# Altium PCB PCB1_1.pcbdoc
Units mil, origin at the board's own origin, x right, y up, seen from the top; angles counter-clockwise.
Board outline 1764.32 x 1571.64 mil, 2 copper layers (Top Layer, Bottom Layer); 44 components, 41 nets, 156 pads, 77 vias.
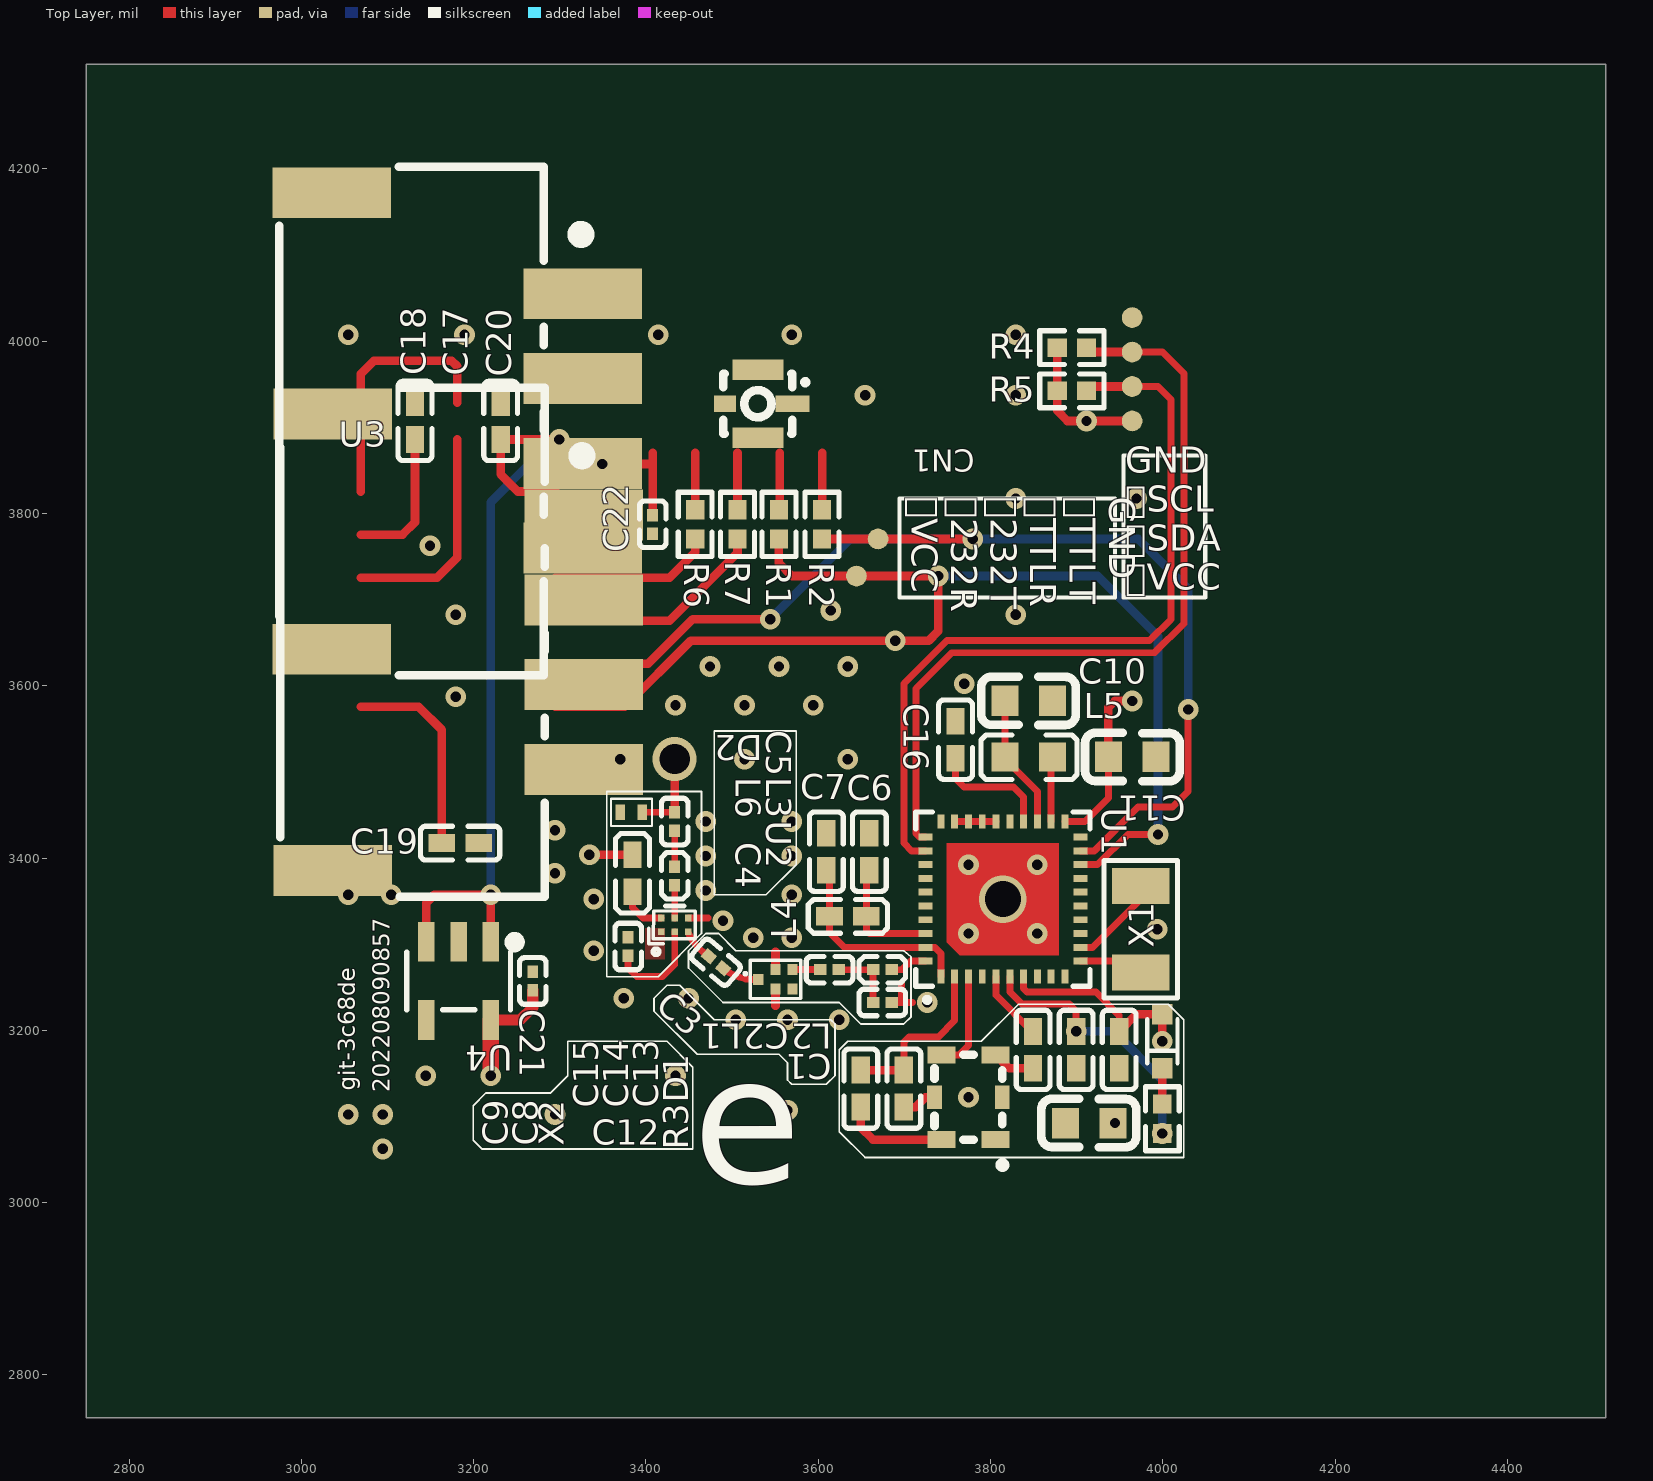
[diagram p0: Top Layer view]
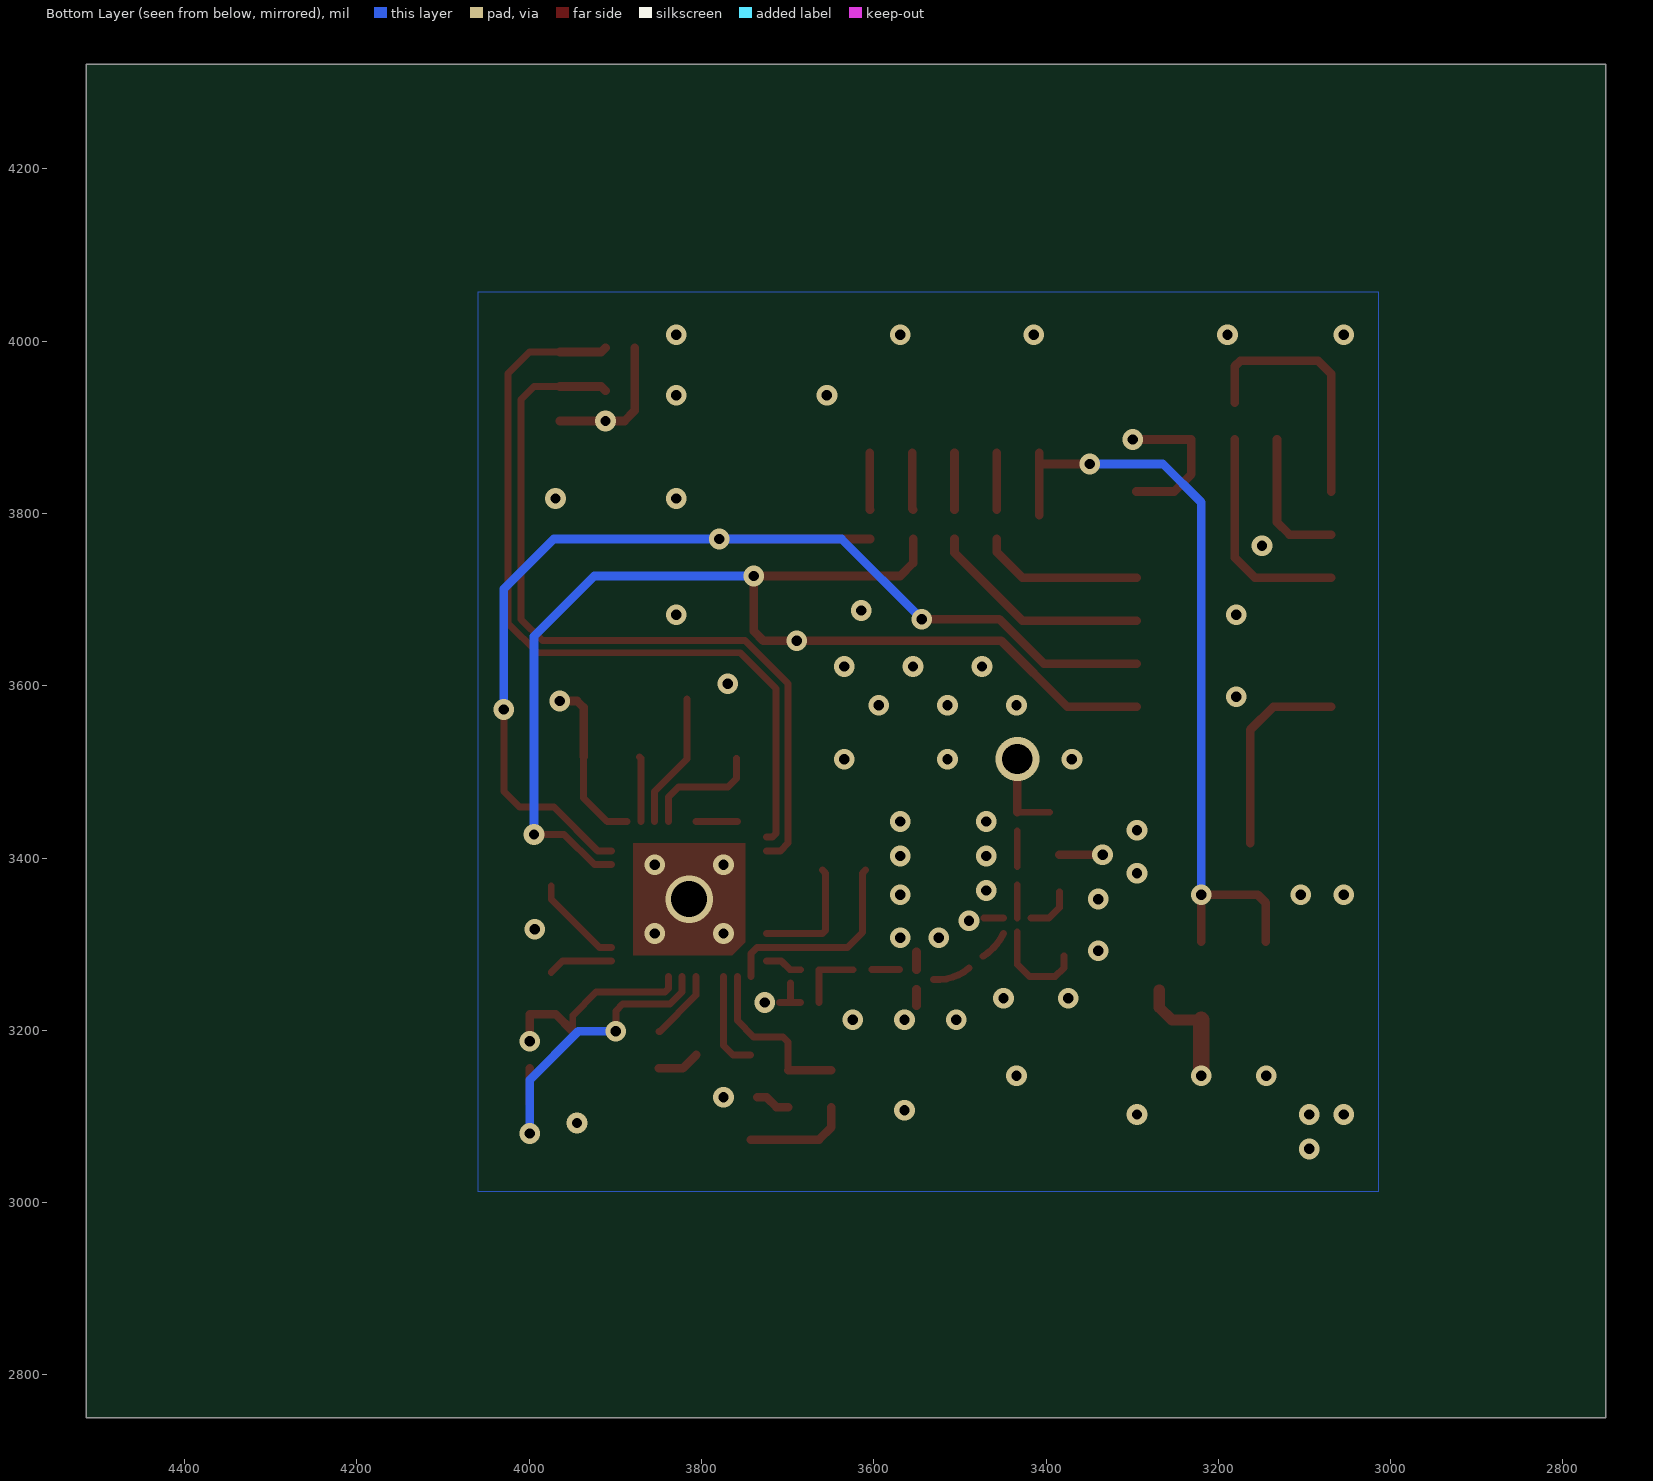
[diagram p1: Bottom Layer view, seen from below]

## Layer stack, top to bottom
Top Solder: solder mask 0.4, Solder Resist, Dk 3.5
Top Layer: signal copper 1.4
Dielectric 1: dielectric 12.6, FR-4, Dk 4.8
Bottom Layer: signal copper 1.4
Bottom Solder: solder mask 0.4, Solder Resist, Dk 3.5

## Board outline
4514.32,2750 2750,2750 2750,4321.64 4514.32,4321.64

## Components (designator, comment, footprint, x,y, rotation, side; value= is the part's Value field where it differs from the comment)
C1 "GRM0335C1H2R2CA01D" C0201 3674.32,3232.32 r180 top
C2 "GRM0335C1H470JA01D" C0201 3613.08,3270.32 r0 top
C3 "GRM0335C1H470JA01D" C0201 3481.23,3279.02 r140 top
C4 "CL03A104KQ3NNNC" C0201 3379.32,3297.32 r270 top
C5 "GRM0335C1H470JA01D" C0201 3433.32,3442.32 r270 top
C6 "CL05A225MQ5NNNC" C0402 3659.32,3407.32 r270 top
C7 "CL05A225MQ5NNNC" C0402 3609.32,3407.32 r270 top
C8 "CL05A225MQ5NNNC" C0402 3699.32,3132.32 r90 top
C9 "CL05B102KB5NNNC" C0402 3649.32,3132.32 r90 top
C10 "CL10A475KQ8NNNC" C0603 3844.32,3582.32 r0 top
C11 "CL10A475KQ8NNNC" C0603 3964.32,3517.32 r180 top
C12 "CL10A475KQ8NNNC" C0603 3914.32,3092.32 r0 top
C13 "CL05A225MQ5NNNC" C0402 3949.32,3177.32 r90 top
C14 "CL05A225MQ5NNNC" C0402 3899.32,3177.32 r90 top
C15 "CL05A225MQ5NNNC" C0402 3849.32,3177.32 r90 top
C16 "CL05A225MQ5NNNC" C0402 3759.32,3537.32 r270 top
C17 "CL05A225MQ5NNNC" CONN-TH_4P-P0.20_XUNPU_WAFER-XH2.54-4PWB 3180.86,3907.32 r270 top
C18 "CL05A225MQ5NNNC" C0402 3131.86,3907.32 r90 top
C19 "CL05A225MQ5NNNC" C0402 3184.32,3417.32 r180 top
C20 "CL05A225MQ5NNNC" C0402 3231.36,3907.32 r90 top
C21 "GRM0335C1H470JA01D" C0201 3268.55,3257.32 r270 top
C22 "GRM0335C1H470JA01D" C0201 3407.8,3787.32 r90 top
CN1 "CONN-SMD_6P-P1.25_L4.4-W12.4" IPEX-SMD_4P-L1.7-W1.7-LS2.0-L 3530.82,3927.32 r180 top
D1 "RB751S-40" SOD-523_L1.2-W0.8-LS1.6-FD 3999.32,3187.32 r270 top
D2 "ESD105-B1-02EL E6327" TSLP-2-20_L1.0-W0.6-P0.65-BI 3382.92,3453.12 r180 top
L1 "SAFEB1G57KE0F00R15" FILTER-SMD_5P-L1.4-W1.1-L_HDF1588E-B2 3550.32,3259.02 r0 top
L2 "LQP03TG10NH02D" L0201 3674.32,3270.32 r0 top
L3 "LQP03TN6N8H02D" L0201-RD 3433.32,3379.32 r90 top
L4 "BLM15AG601SN1D" L0402 3634.32,3332.32 r180 top
L5 "LQM18PN2R2NC0L" L0603 3844.32,3517.32 r180 top
L6 "BLM15AG601SN1D" L0402 3384.32,3382.32 r270 top
R1 "CR0402J1K00Q10Z" R0402 3554.32,3787.32 r90 top
R2 "CR0402J1K00Q10Z" R0402 3604.32,3787.32 r90 top
R3 "0402WGJ0561TCE" R0402 3999.32,3097.32 r270 top
R4 "CRCW04024K70JNED" R0402 3894.32,3992.32 r0 top
R5 "CRCW04024K70JNED" R0402 3894.32,3942.32 r0 top
R6 "CR0402J1K00Q10Z" R0402 3457.02,3787.32 r90 top
R7 "CR0402J1K00Q10Z" R0402 3506.22,3787.32 r90 top
U1 "TD1030QFN" TD1030QFN40 3814.32,3352.32 r0 top
U2 "BGA 824N6 E6327" TSNP-6_L1.1-W0.7-P0.40-BL 3433.32,3322.32 r0 top
U3 "CBM3232AS16" CONN-TH_4P-P0.20_XUNPU_WAFER-XH2.54-4PWB 3181.93,3650.43 r270 top
U4 "MIC5203-3.3YM5-TR" SOT-23-5_L3.0-W1.7-P0.95-LS2.8-BL 3182.46,3257.32 r180 top
X1 "NX3215SA-32.768K-STD-MUA-9" OSC-SMD_L3.2-W1.5 3974.32,3317.32 r90 top
X2 "TCO22260002805" SMD-2520_6P-L2.5-W2.0 3774.32,3122.32 r90 top

## Footprints (in the part's own frame and the unit in brackets; to place one, negate y for a bottom-side part, rotate by r counter-clockwise, add the part's x,y. Pads: shape width x height; smd on the part's side, far side on the other; paste and mask are expansions set on the pad)
C0201 [mil]
  rect 14.51x12.76 smd: 1(-10.8,0) 2(10.8,0)
  silkscreen extent -27,-15 27,15
C0402 [mm]
  rect 0.79x0.54 smd: 1(-0.545,0) 2(0.545,0)
  silkscreen extent -1.17,-0.5 1.17,0.5
C0603 [mm]
  rect 0.8x0.9 smd: 1(-0.7,0) 2(0.7,0)
  silkscreen extent -1.41,-0.71 1.39,0.72
CONN-TH_4P-P0.20_XUNPU_WAFER-XH2.54-4PWB [mm]
  rect 1.5x3.5 smd: 1(-3.75,3.7) 2(-1.25,3.7) 3(1.25,3.7) 4(3.75,3.7) 5(-6.73,-3.7) 6(6.73,-3.7)
  silkscreen extent -7.5,-5.25 7.5,3.85
FILTER-SMD_5P-L1.4-W1.1-L_HDF1588E-B2 [mm]
  rect 0.3x0.325 smd: 1(-0.506,0) 2(0.001,-0.288) 3(0.506,-0.288) 4(0.506,0.288) 5(0.001,0.288)
  silkscreen extent -0.93,-0.56 0.75,0.57
IPEX-SMD_4P-L1.7-W1.7-LS2.0-L [mm]
  rect 1x0.5 smd: 1(-1,0)
  rect 1.5x0.6 smd: 2(0.025,-1) 4(0.025,1)
  rect 0.65x0.5 smd: 3(1,0)
  silkscreen extent -1.45,-0.89 1.04,0.89
L0201 [mil]
  rect 14.51x12.76 smd: 1(-10.8,0) 2(10.8,0)
  silkscreen extent -27,-15 27,15
L0201-RD [mil]
  rect 14.51x12.76 smd: 1(-10.8,0) 2(10.8,0)
  silkscreen extent -35,-15 27,15
L0402 [mm]
  rect 0.79x0.54 smd: 1(-0.545,0) 2(0.545,0)
  silkscreen extent -1.17,-0.5 1.17,0.5
L0603 [mm]
  rect 0.8x0.864 smd: 1(-0.7,0) 2(0.7,0)
  silkscreen extent -1.42,-0.65 1.41,0.67
OSC-SMD_L3.2-W1.5 [mil]
  rect 41.3x66.9 smd: 1(-50.2,0) 2(50.2,0)
  silkscreen extent -80,-43 80,43
R0402 [mm]
  rect 0.566x0.54 smd: 1(-0.433,0) 2(0.433,0)
  silkscreen extent -0.94,-0.5 0.94,0.5
SMD-2520_6P-L2.5-W2.0 [mil]
  rect 19.7x32.5 smd: 1(-49.2,-31.5) 3(49.2,-31.5) 4(49.2,31.5) 6(-49.2,31.5)
  rect 27.6x16.9 smd: 2(0,-39.4) 5(0,39.4)
  silkscreen extent -82,-42 49,39
SOD-523_L1.2-W0.8-LS1.6-FD [mil]
  rect 23.6x23.6 smd: 1(-31.5,0) 2(31.5,0)
  silkscreen extent -26,-18 26,18
SOT-23-5_L3.0-W1.7-P0.95-LS2.8-BL [mm]
  rect 0.49x1.157 smd: 1(-0.95,-1.154) 2(0,-1.154) 3(0.95,-1.154)
  rect 0.49x1.175 smd: 4(0.95,1.154) 5(-0.95,1.154)
  silkscreen extent -1.8,-1.29 1.53,0.85
TD1030QFN40 [mil]
  rect 8x16 smd: 1(-72,-90) 2(-56,-90) 3(-40,-90) 4(-24,-90) 5(-8,-90) 6(8,-90) 7(24,-90) 8(40,-90) 9(56,-90) 10(72,-90) 21(72,90) 22(56,90) 23(40,90) 24(24,90) 25(8,90) 26(-8,90) 27(-24,90) 28(-40,90) 29(-56,90) 30(-72,90)
  rect 16x8 smd: 11(90,-72) 12(90,-56) 13(90,-40) 14(90,-24) 15(90,-8) 16(90,8) 17(90,24) 18(90,40) 19(90,56) 20(90,72) 31(-90,72) 32(-90,56) 33(-90,40) 34(-90,24) 35(-90,8) 36(-90,-8) 37(-90,-24) 38(-90,-40) 39(-90,-56) 40(-90,-72)
  Top Layer region: -65,65 65,65 65,-65 -50,-65 -65,-50
  silkscreen extent -101,-120 101,101
TSLP-2-20_L1.0-W0.6-P0.65-BI [mil]
  rect 11x17.7 smd: 1(-13,0) 2(13,0)
  silkscreen extent -24,-16 23,16
TSNP-6_L1.1-W0.7-P0.40-BL [mil]
  rect 7.9x7.9 smd: 1(-15.7,-7.9) 2(0,-7.9) 3(15.8,-7.9) 4(15.8,7.9) 5(0,7.9) 6(-15.7,7.9)
  silkscreen extent -30,-34 24,16

## Free pads (board coordinates)
  round 24 smd: TP1(3644.32,3727.32) TP2(3669.32,3770.32) TP4(3964.32,4027.32) TP5(3964.32,3947.32) TP6(3964.32,3987.32) TP7(3964.32,3907.32)

## Via types
v1: diameter 24.02, hole 12.01, Top Layer to Bottom Layer, 71 vias
v2: diameter 24, hole 12, Top Layer to Bottom Layer, 4 vias
v3: diameter 51, hole 35, Top Layer to Bottom Layer, 1 vias
v4: diameter 55, hole 42, Top Layer to Bottom Layer, 1 vias

## Nets (pads, with @x,y where several pads share a name; then routed paths per layer and width w, separated by ;. In a path a pad name is that pad's centre, name@x,y a point inside that pad or via, vN(x,y) a via of type N, cw(c..) or ccw(c..) an arc to the next point about the centre after c; other vN are vias at no path point)
232_RX0: CN1.4 | length 65.9
  Top Layer w10: 3506.22,3804.36 3506.22,3870.23
232_TX0:  | length 65.9
  Top Layer w10: 3457.01,3804.37 3457.01,3870.23
$1N3753: L2.1 | length 77.6
  Top Layer w8: 3623.88,3270.32 L2.1 3663.52,3232.32
$1N3829: C2.1 L1.4 | length 32
  Top Layer w8: L1.4 C2.1@3602.24,3270.36
$1N4304: U2.2 | length 116.2
  Top Layer w8: 3379.32,3286.52 3379.32,3272.32 3389.32,3262.32 3419.32,3262.32 3433.32,3276.32 U2.2
$1N5920: U2.5 | length 38.3
  Top Layer w8: U2.5 3433.32,3368.52
$1N6055: L3.2 | length 41.4
  Top Layer w8: L3.2 3433.32,3431.52
$1N6532: U2.3 | length 35.8
  Top Layer w8: U2.3@3449.32,3312.32 ccw(c3507.96,3341.13) 3472.95,3285.96
$1N6544: C3.1 | length 44.3
  Top Layer w8: C3.1@3489.32,3272.32 ccw(c3525.79,3314.87) 3530.4,3259.02
$1N6600: C5.1 D2.1 | length 99.1
  Top Layer w8: D2.1 C5.1
  Top Layer w10: C5.1 v3(3433.32,3514.82)
$1N9128: C9.1 X2.6 | length 122.9
  Top Layer w10: C9.1 3649.32,3087.32 3663.52,3073.12 X2.6
$1N17423: R3.1 | length 41.5
  Top Layer w10: R3.1 3999.32,3155.82
$2N670: C18.1 U3.2 | length 165
  Top Layer w10: 3068.84,3775.43 3117.43,3775.43 3131.86,3789.86 C18.1
$2N675: U3.6 | length 236.5
  Top Layer w10: 3068.84,3575.43 3136.21,3575.43 3162.86,3548.78 3162.86,3417.32
$2N680: C17.1 | length 299.6
  Top Layer w10: 3068.84,3825.43 3068.84,3961.84 3084.32,3977.32 3174.32,3977.32 3180.86,3970.78 3180.86,3928.78
$2N685: U3.3 | length 258.7
  Top Layer w10: 3068.84,3725.43 3157.43,3725.43 3180.86,3748.86 3180.86,3885.86
$2N845: R6.1 | length 189.5
  Top Layer w10: 3295.02,3725.43 3427.43,3725.43 3457.02,3755.02 R6.1
$2N849: R7.1 | length 259.9
  Top Layer w10: 3295.02,3675.43 3427.43,3675.43 3506.22,3754.22 R7.1
GND: C1.1 C4.1 C6.1 C7.1 C8.1 C11.1 C12.1 C13.1 C14.1 C15.1 C16.1 C19.1 C21.1 C22.1 CN1.1 L1.2 L1.3 L1.5 pad.TP4 U1.26 U1.27 U1.28 U1.29 U2.1 U2.4 U4.2 X2.2 X2.3 X2.5 | length 248.4
  Top Layer w8: U2.4 3472.22,3330.22 ; C1.1 3696.51,3232.32 ; 3696.51,3254.84 3696.51,3232.32 ; 3709.32,3232.32 3696.51,3232.32 ; U1.29 U1.28 U1.27 U1.26
  Top Layer w10: 3550.34,3228.34 L1.2 ; L1.5 3550.34,3291.3 ; C8.1 3712.86,3110.86 3724.32,3122.32 X2.5 ; X2.3 3821.48,3155.86 C15.1
  other v1: 3094.32,3062.32 3054.32,3102.32 3094.32,3102.32 3294.32,3102.32 3564.32,3107.32 3774.32,3122.32 3144.32,3147.32 3434.32,3147.32 3504.32,3212.32 3564.32,3212.32 3624.32,3212.32 3726.32,3232.32 3374.32,3237.32 3449.32,3237.32 3339.32,3292.32 3524.32,3307.32 3569.32,3307.32 3993.4,3317.32 3489.32,3327.32 3339.32,3352.32 3054.32,3357.32 3104.32,3357.32 3569.32,3357.32 3469.32,3362.32 3294.32,3382.32 3469.32,3402.32 3569.32,3402.32 3294.32,3432.32 3469.32,3442.32 3569.32,3442.32 3369.93,3514.82 3514.32,3514.82 3434.32,3577.32 3514.32,3577.32 3594.32,3577.32 3179.32,3587.32 3769.32,3602.32 3474.32,3622.32 3554.32,3622.32 3634.32,3622.32 3179.32,3682.32 3829.32,3682.32 3614.32,3687.32 3149.32,3762.32 3829.32,3817.32 3969.32,3817.32 3654.32,3937.32 3829.32,3937.32 3054.32,4007.32 3189.32,4007.32 3414.32,4007.32 3569.32,4007.32 3829.32,4007.32
GPIO_RX0: pad.TP2 R2.1 U1.19 | length 1381.4
  Top Layer w8: U1.19 3920.32,3408.32 3971.33,3459.33 4011.33,3459.33 4029.32,3477.32 v1(4029.32,3572.32)
  Top Layer w10: 3295.02,3625.43 3402.43,3625.43 3454.32,3677.32 v1(3544.32,3677.32) ; R2.1@3604.36,3770.32 pad.TP2 v1@3778.82,3770.32
  Bottom Layer w10: v1(3544.32,3677.32) 3637.32,3770.32 v1(3779.32,3770.32) 3971.32,3770.32 4029.32,3712.32 v1(4029.32,3572.32)
GPIO_TX0: pad.TP1 R1.1 U1.18 | length 1382.2
  Top Layer w8: U1.18 3924.32,3392.32 3959.32,3427.32 v1(3994.32,3427.32)
  Top Layer w10: 3295.02,3575.43 3375.06,3575.43 3451.95,3652.32 v1(3689.32,3652.32) 3728.11,3652.32 3739.32,3663.53 v1(3739.32,3727.32) pad.TP1 3569.32,3727.32 3554.32,3742.32 R1.1
  Bottom Layer w10: v1(3739.32,3727.32) 3924.32,3727.32 3994.32,3657.32 v1(3994.32,3427.32)
LDO_B_O: U1.5 | length 82
  Top Layer w8: U1.5 3806.32,3240.72 3848.26,3198.78 3849.32,3198.78
LDO_C_O: U1.24 | length 139.9
  Top Layer w8: 3759.32,3515.86 3759.32,3492.32 3769.32,3482.32 3826.69,3482.32 3838.32,3470.69 U1.24
LNA_I: U1.40 | length 43.3
  Top Layer w8: 3685.12,3270.32 3697.32,3270.32 3707.32,3280.32 U1.40
P_1_39: U1.39 | length 240.1
  Top Layer w8: 3609.32,3385.86 3612.86,3382.32 3612.86,3332.32 3612.86,3313.78 3630.32,3296.32 U1.39 3735.32,3296.32 3742.32,3289.32 3742.32,3262.32
P_2&LDO_X_OUT: U1.2 | length 202.9
  Top Layer w8: 3699.32,3153.78 3699.32,3186.33 3705.31,3192.32 3739.32,3192.32 3758.32,3211.32 U1.2
  Top Layer w10: 3649.32,3153.78 3699.32,3153.78
P_22: U1.22 | length 75.6
  Top Layer w8: U1.22 3870.32,3515.76 3871.87,3517.32
P_23: C10.1 L5.2 U1.23 | length 155.6
  Top Layer w8: L5.2@3816.76,3514.87 3854.32,3477.32 U1.23 ; L5.2 C10.1@3816.76,3584.76
P_38: L4.1 U1.38 | length 141.5
  Top Layer w8: 3659.32,3385.86 3655.78,3382.32 L4.1 3655.78,3315.86 3659.32,3312.32 U1.38
RTC_I: U1.12 X1.2 | length 108.4
  Top Layer w8: U1.12 3918.32,3296.32 3974.32,3352.32 X1.2
RTC_O: U1.11 | length 75.5
  Top Layer w8: U1.11 3961.12,3280.32 3974.32,3267.12
S_RX0: CN1.2 | length 66
  Top Layer w10: 3604.32,3804.36 3604.65,3804.69 3604.65,3870.23
S_TX0: CN1.3 | length 66.3
  Top Layer w10: 3554.32,3804.36 3555.43,3805.47 3555.43,3870.23
SCL: pad.TP6 U1.31 | length 938.6
  Top Layer w8: U1.31 3717.32,3424.32 3713.32,3428.32 3713.32,3596.52 3755.12,3638.32 3990.32,3638.32 4024.32,3672.32 4024.32,3962.32 3999.32,3987.32 pad.TP6
  Top Layer w10: 3911.36,3992.32 3916.36,3987.32 pad.TP6
SDA: pad.TP5 U1.32 | length 916.2
  Top Layer w8: U1.32 3708.32,3408.32 3699.32,3417.32 3699.32,3602.32 3749.32,3652.32 3984.52,3652.32 4009.32,3677.12 4009.32,3932.32 3994.32,3947.32 pad.TP5
  Top Layer w10: 3911.36,3942.32 3916.36,3947.32 pad.TP5
V_BCKP: U1.6 | length 313
  Top Layer w8: U1.6 3822.32,3244.52 3836.52,3230.32 3891.32,3230.32 3899.32,3222.32 v1(3899.32,3198.78)
  Bottom Layer w10: v1(3899.32,3198.78) 3942.86,3198.78 3999.32,3142.32 v1(3999.32,3080.28)
VCC: C20.1 D1.1 L6.1 pad.TP7 R4.1 R5.1 U1.7 U1.21 U4.5 | length 978.3
  Top Layer w8: U1.7 3838.32,3248.32 3842.32,3244.32 3922.32,3244.32 3949.32,3217.32 3949.32,3198.78 ; U1.21 3909.32,3442.32 3936.76,3469.76 3936.76,3517.32
  Top Layer w10: 3295.02,3825.43 3251.21,3825.43 3231.36,3845.28 C20.1 v1@3299.28,3885.86 ; v1(3334.32,3403.78) L6.1 ; R4.1 R5.1 3877.28,3919.36 3889.32,3907.32 v1(3911.32,3907.32) pad.TP7 ; 3936.76,3517.32 3936.76,3574.76 3944.32,3582.32 v1(3964.32,3582.32) ; 3949.32,3198.78 3969.36,3218.82 D1.1 v1(3999.32,3187.32)
  Top Layer w12.8: U4.5 3253.9,3211.9 3268.55,3226.55 3268.55,3246.52
  Top Layer w19.3: v1@3219.86,3147.36 U4.5
  other v1: 3944.32,3092.32 3219.82,3147.32 3634.32,3514.82 3299.32,3885.82
VCC_RF_3V3:  | length 56.9
  Top Layer w8: 3384.32,3360.86 3384.32,3342.32 3396.42,3330.22 3417.62,3330.22
VCC_SOURCE: U4.3 | length 912.5
  Top Layer w10: U4.3 3145.06,3348.06 3154.32,3357.32 v1(3219.86,3357.32) 3219.86,3302.74 ; v1(3349.32,3857.32) 3407.8,3857.32 ; 3407.8,3798.12 3407.8,3857.32 ; 3407.8,3870.23 3407.8,3857.32
  Bottom Layer w10: v1(3219.86,3357.32) 3219.86,3812.86 3264.32,3857.32 v1(3349.32,3857.32)
XTAL_I: U1.3 X2.4 | length 116
  Top Layer w8: X2.4 3763.52,3171.52 3774.32,3182.32 U1.3
"": 
pads on no net: C1.2 C2.2 C3.2 C4.2 C5.2 C6.2 C7.2 C8.2 C9.2 C10.2 C11.2 C12.2 C13.2 C14.2 C15.2 C16.2 C17.2 C17.3 C17.4 C17.5 C17.6 C18.2 C19.2 C20.2 C21.2 C22.2 D1.2 D2.2 L1.1 L2.2 L3.1 L4.2 L5.1 L6.2 R1.2 R2.2 R3.2 R4.2 R5.2 R6.2 R7.2 U1.1 U1.4 U1.8 U1.9 U1.10 U1.13 U1.14 U1.15 U1.16 U1.17 U1.20 U1.25 U1.30 U1.33 U1.34 U1.35 U1.36 U1.37 U2.6 U3.1 U3.4 U3.5 U4.1 U4.4 X1.1 X2.1
copper on no net:
  other v2: 3774.32,3312.32 3854.32,3312.32 3774.32,3392.32 3854.32,3392.32
  other v4: 3814.32,3352.32

## Polygon pours and split planes (outlines as drawn)
GND on Top Layer (solid, remove dead copper): 3014.32,3012.32 4059.32,3012.32 4059.32,4057.32 3014.32,4057.32
GND on Bottom Layer (solid, remove dead copper, pour order 1): 3014.32,3012.32 4059.32,3012.32 4059.32,4057.32 3014.32,4057.32
GND on Internal Plane 1 (split plane): 4057.22,3084.04 cw(c4022.41,3049.23) 3987.59,3014.42 3084.04,3014.42 cw(c3049.23,3049.23) 3014.42,3084.04 3014.42,3987.59 cw(c3049.23,4022.41) 3084.04,4057.22 3987.59,4057.22 cw(c4022.41,4022.41) 4057.22,3987.59 4057.22,3084.04
VCC on Internal Plane 2 (split plane): 4057.22,3084.04 cw(c4022.41,3049.23) 3987.59,3014.42 3084.04,3014.42 cw(c3049.23,3049.23) 3014.42,3084.04 3014.42,3987.59 cw(c3049.23,4022.41) 3084.04,4057.22 3987.59,4057.22 cw(c4022.41,4022.41) 4057.22,3987.59 4057.22,3084.04

## Silkscreen, mask and mechanical layers (free items; w line width, h text height)
Top Overlay:
  lines w2: 3309.32,3147.32 3289.32,3127.32 3214.32,3127.32 3199.32,3112.32 3199.32,3072.32 3209.32,3062.32 3454.32,3062.32 3454.32,3157.32 3424.32,3187.32 3309.32,3187.32 3309.32,3147.33 ; 3479.32,3547.32 3574.32,3547.32 3574.32,3392.32 3539.32,3357.32 3479.32,3357.32 3479.32,3547.36 ; 3354.32,3262.32 3414.32,3262.32 3464.32,3312.32 3464.32,3477.32 3354.32,3477.32 3354.32,3262.32 ; 3409.32,3222.32 3459.32,3172.32 3554.32,3172.32 3564.32,3162.32 3564.32,3142.32 3569.32,3137.32 3609.32,3137.32 3619.32,3147.32 3619.32,3207.32 3614.32,3212.32 3479.32,3212.32 3439.32,3252.32 3424.32,3252.32 3409.32,3237.32 3409.32,3222.32 ; 3449.32,3272.32 3449.32,3292.32 3469.32,3312.32 3484.32,3312.32 3504.32,3292.32 3699.33,3292.32 3707.72,3285.34 3707.72,3215.72 3699.32,3207.32 3649.32,3207.32 3624.32,3232.32 3489.32,3232.32 3449.32,3272.32 ; 3624.32,3082.32 3624.32,3177.32 3634.32,3187.32 3789.32,3187.32 3832.32,3230.32 4006.32,3230.32 4024.32,3212.32 4024.32,3052.32 3654.32,3052.32 3624.32,3082.32
  lines w5: 3694.32,3702.32 3944.32,3702.32 3944.32,3817.32 3694.32,3817.32 3694.32,3702.32 ; 3954.32,3702.32 4049.32,3702.32 4049.32,3867.32 3954.32,3867.32 3954.32,3702.32
  text "GND /  TTLT /  TTLR /  232T /  232R /  VCC" at 3708.2,3819.25 h30.63 r270
  text "GND /  SCL /  SDA /  VCC" at 3956.4,3711.2 h30.23
  text "git-3c68de" at 3062.66,3129.67 h19.47 r90
  text "202208090857" at 3102.66,3127.96 h19.47 r90
  text "e" at 3454.32,3022.32 h150
Mechanical 1:
  lines w10: 3004.32,3004.32 4067.32,3004.32 4067.32,4067.32 3004.32,4067.32 3004.32,3004.32